# Altium PCB Copy of IR_Sensor.PcbDoc
Units mil, origin at the board's own origin, x right, y up, seen from the top; angles counter-clockwise.
Board outline 1602.49 x 1674.6 mil, 4 copper layers (Top Layer, GND, PWR, Bottom Layer), stack 61.581 mil thick; 53 components, 41 nets, 214 pads, 214 vias.
Unrouted connection lines stored in the file: 2.
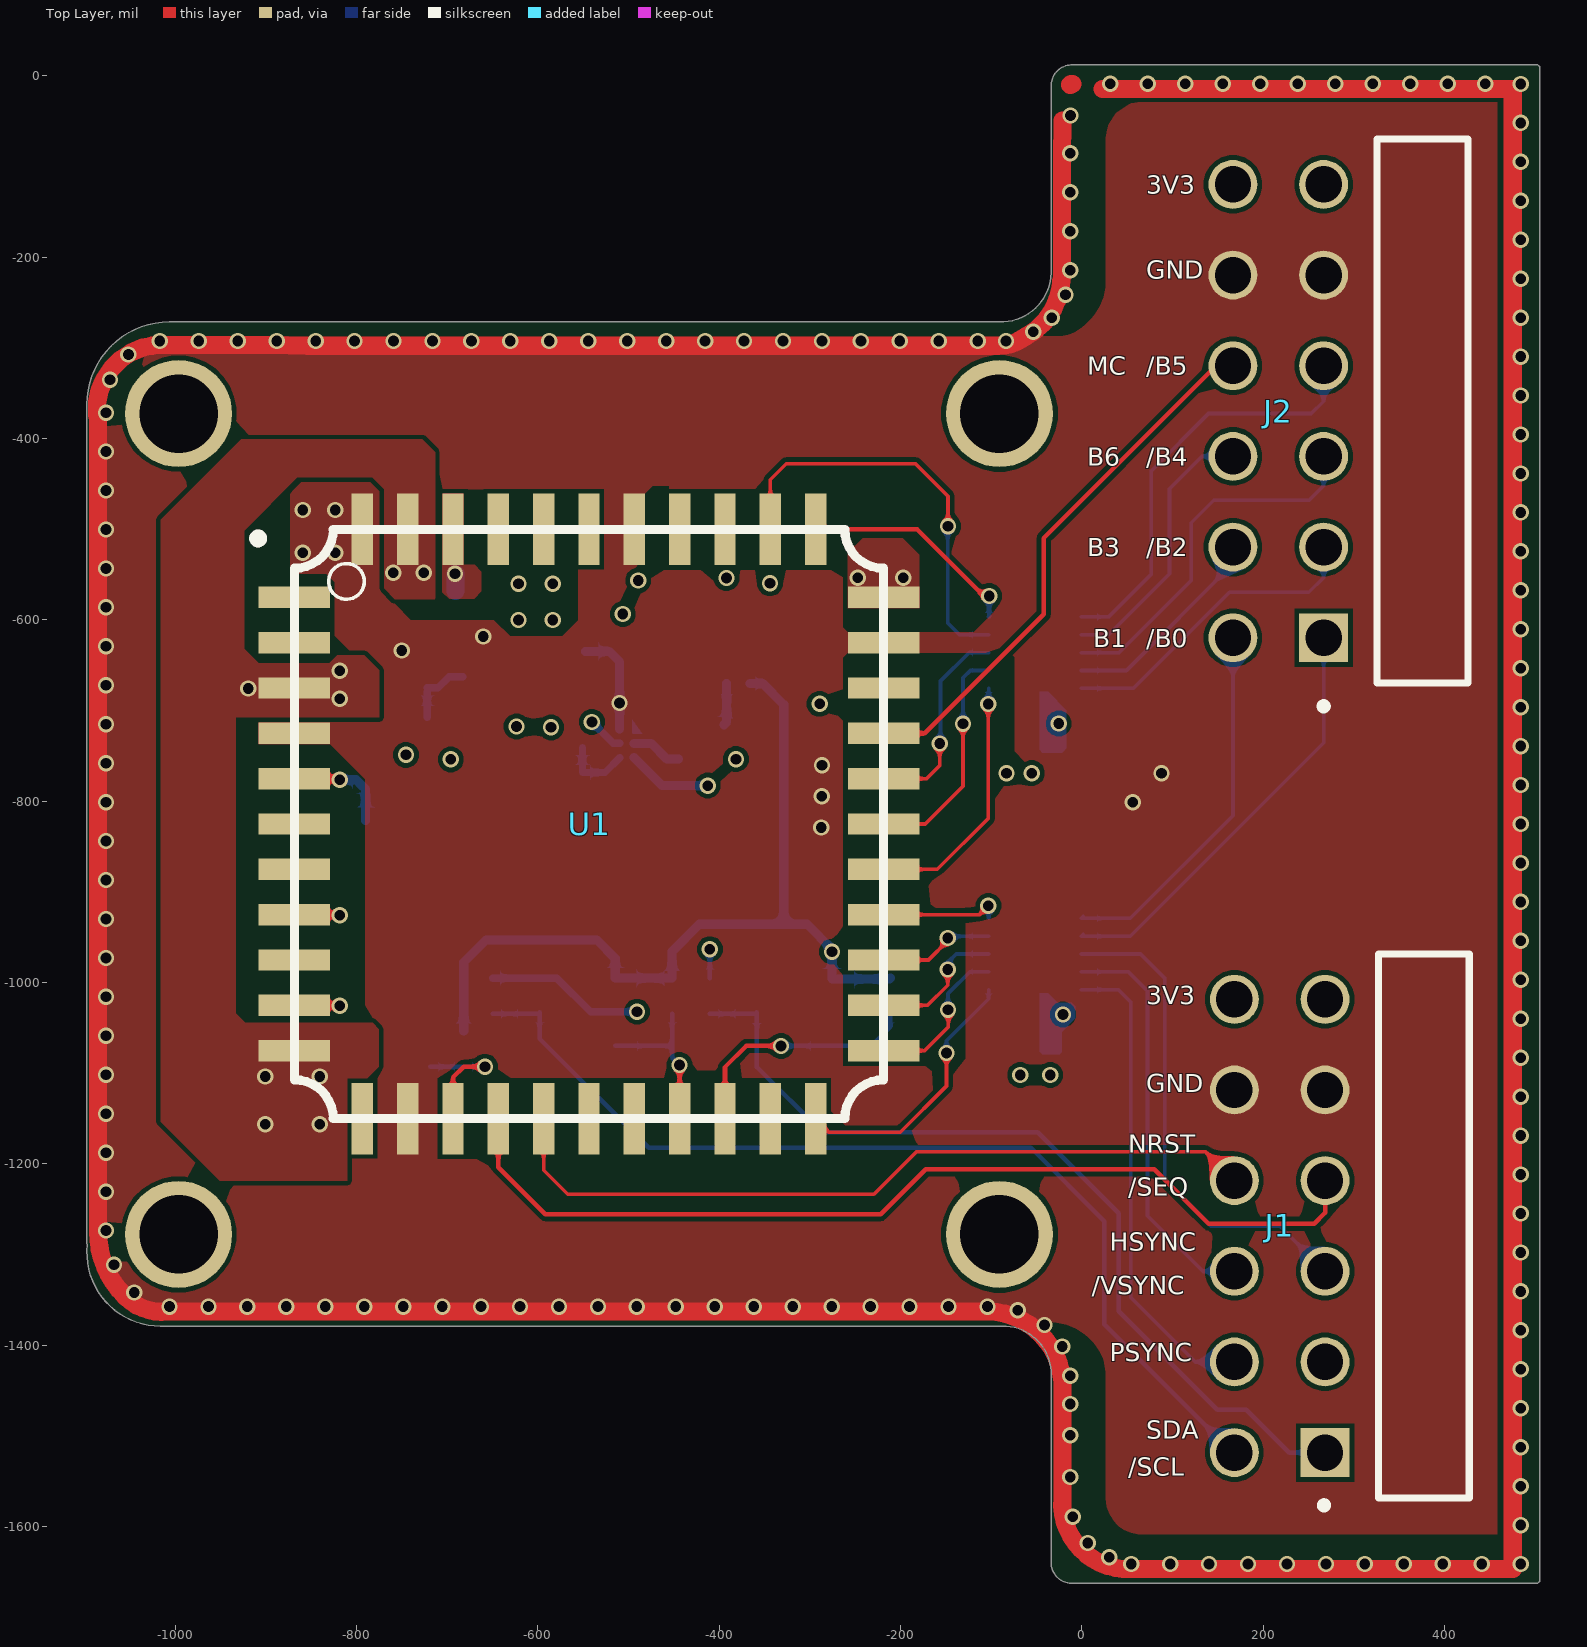
[diagram p0: Top Layer view]
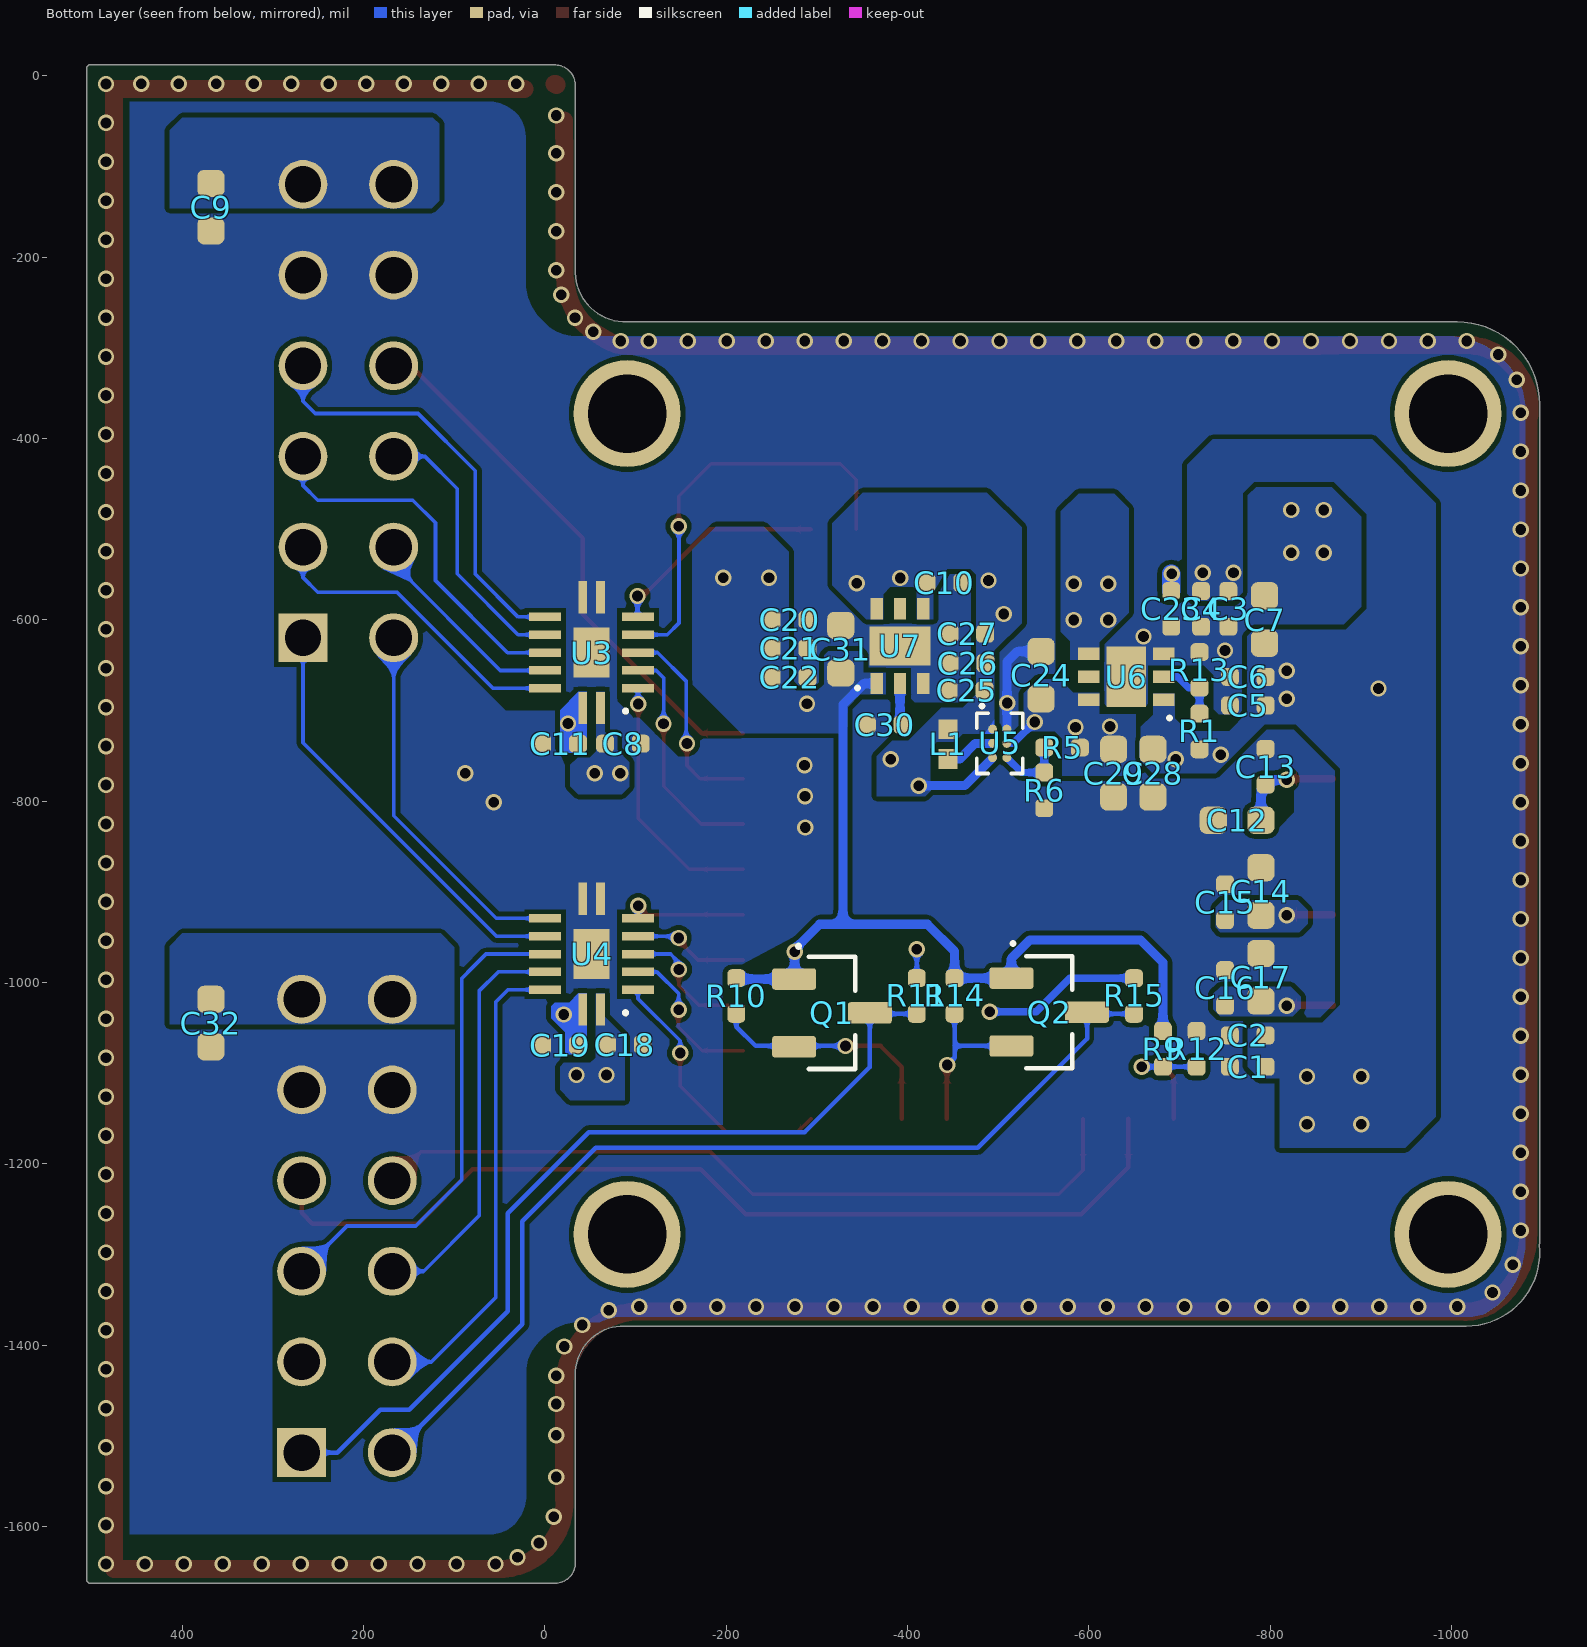
[diagram p1: Bottom Layer view, seen from below]
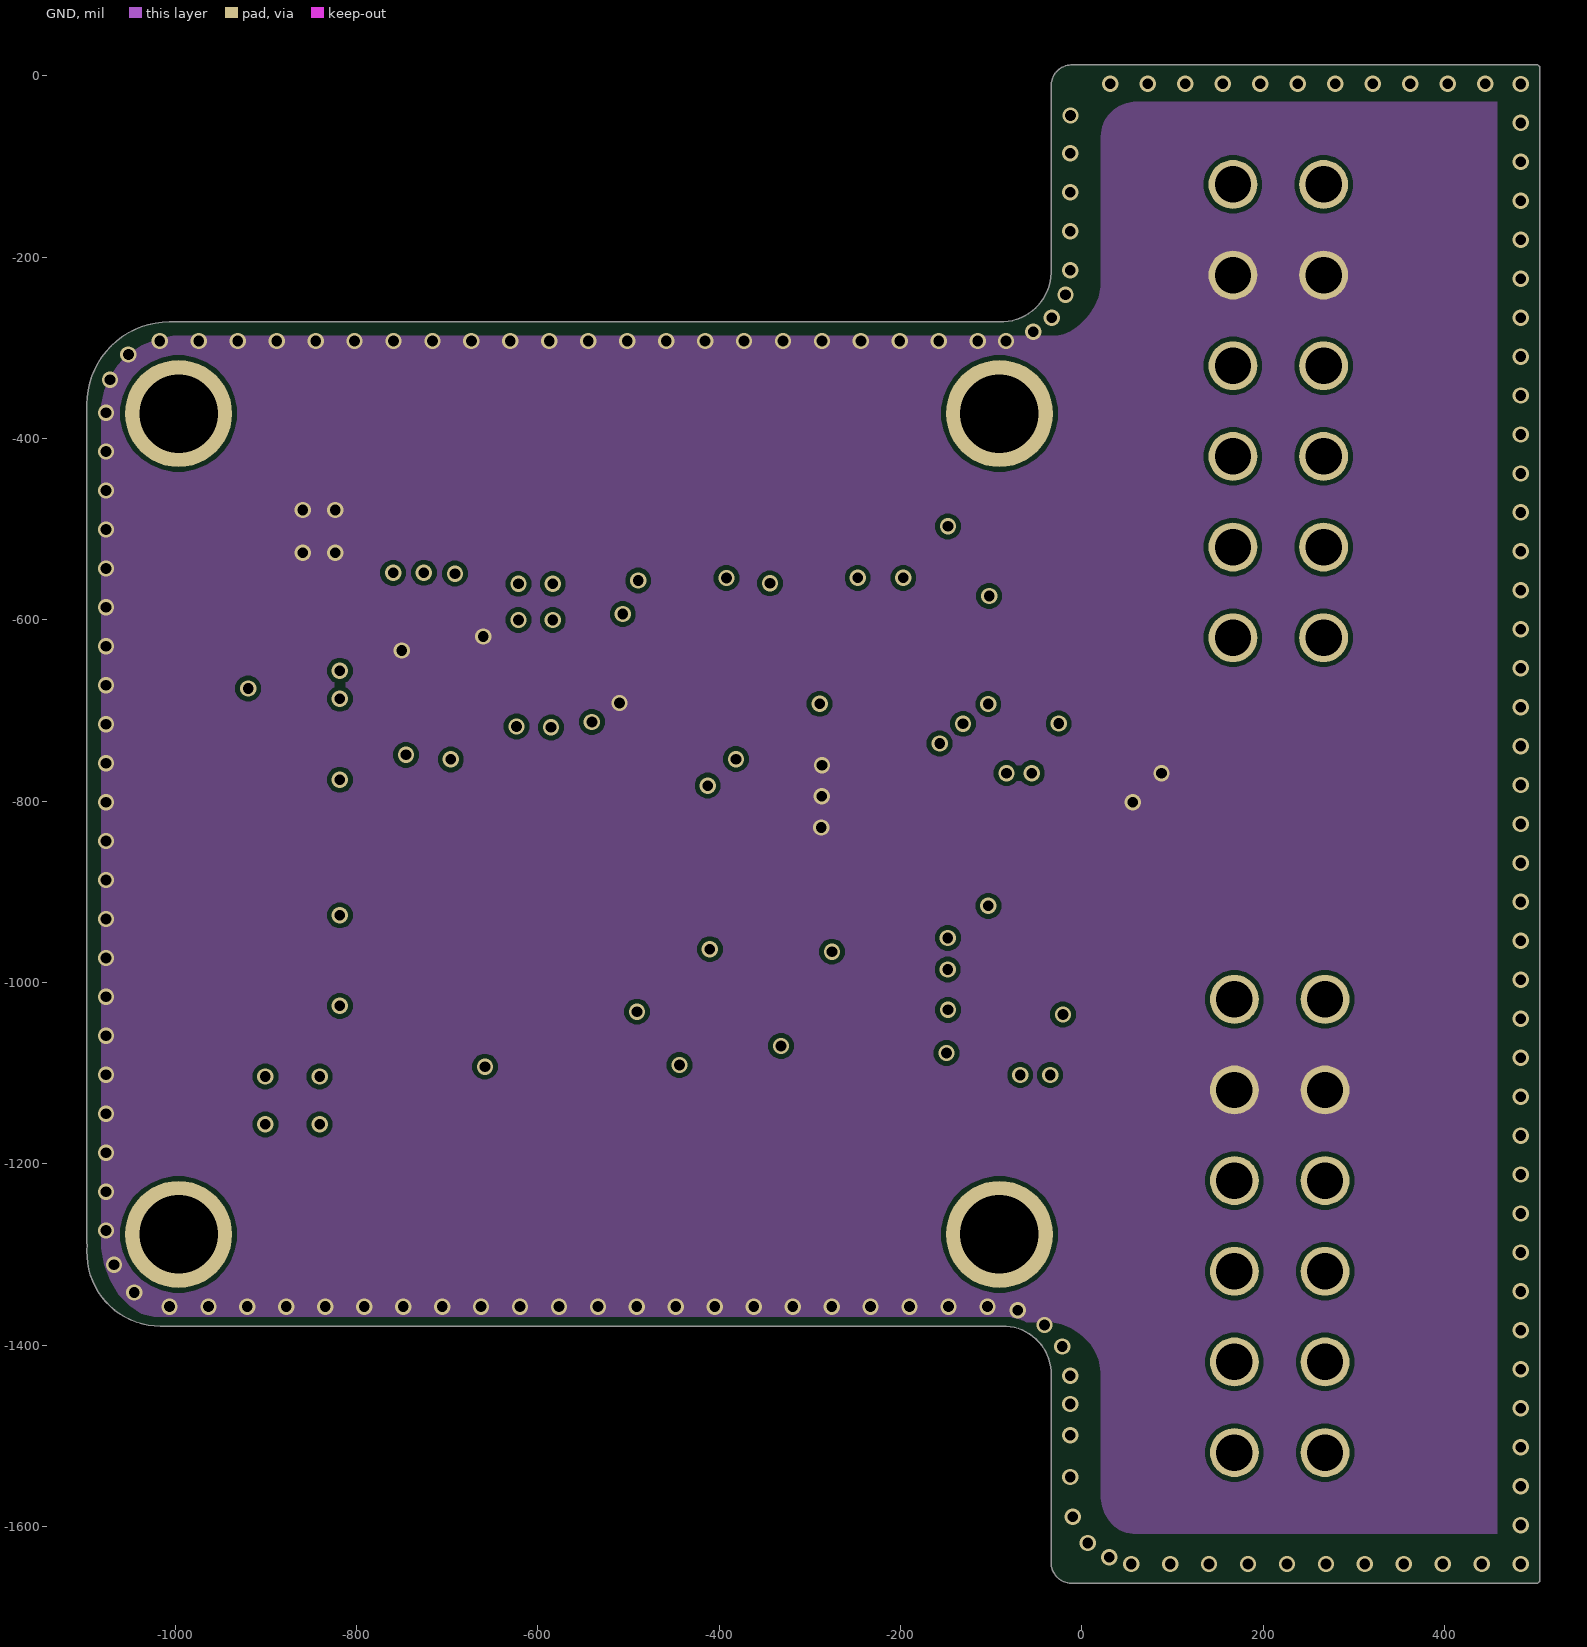
[diagram p2: GND]
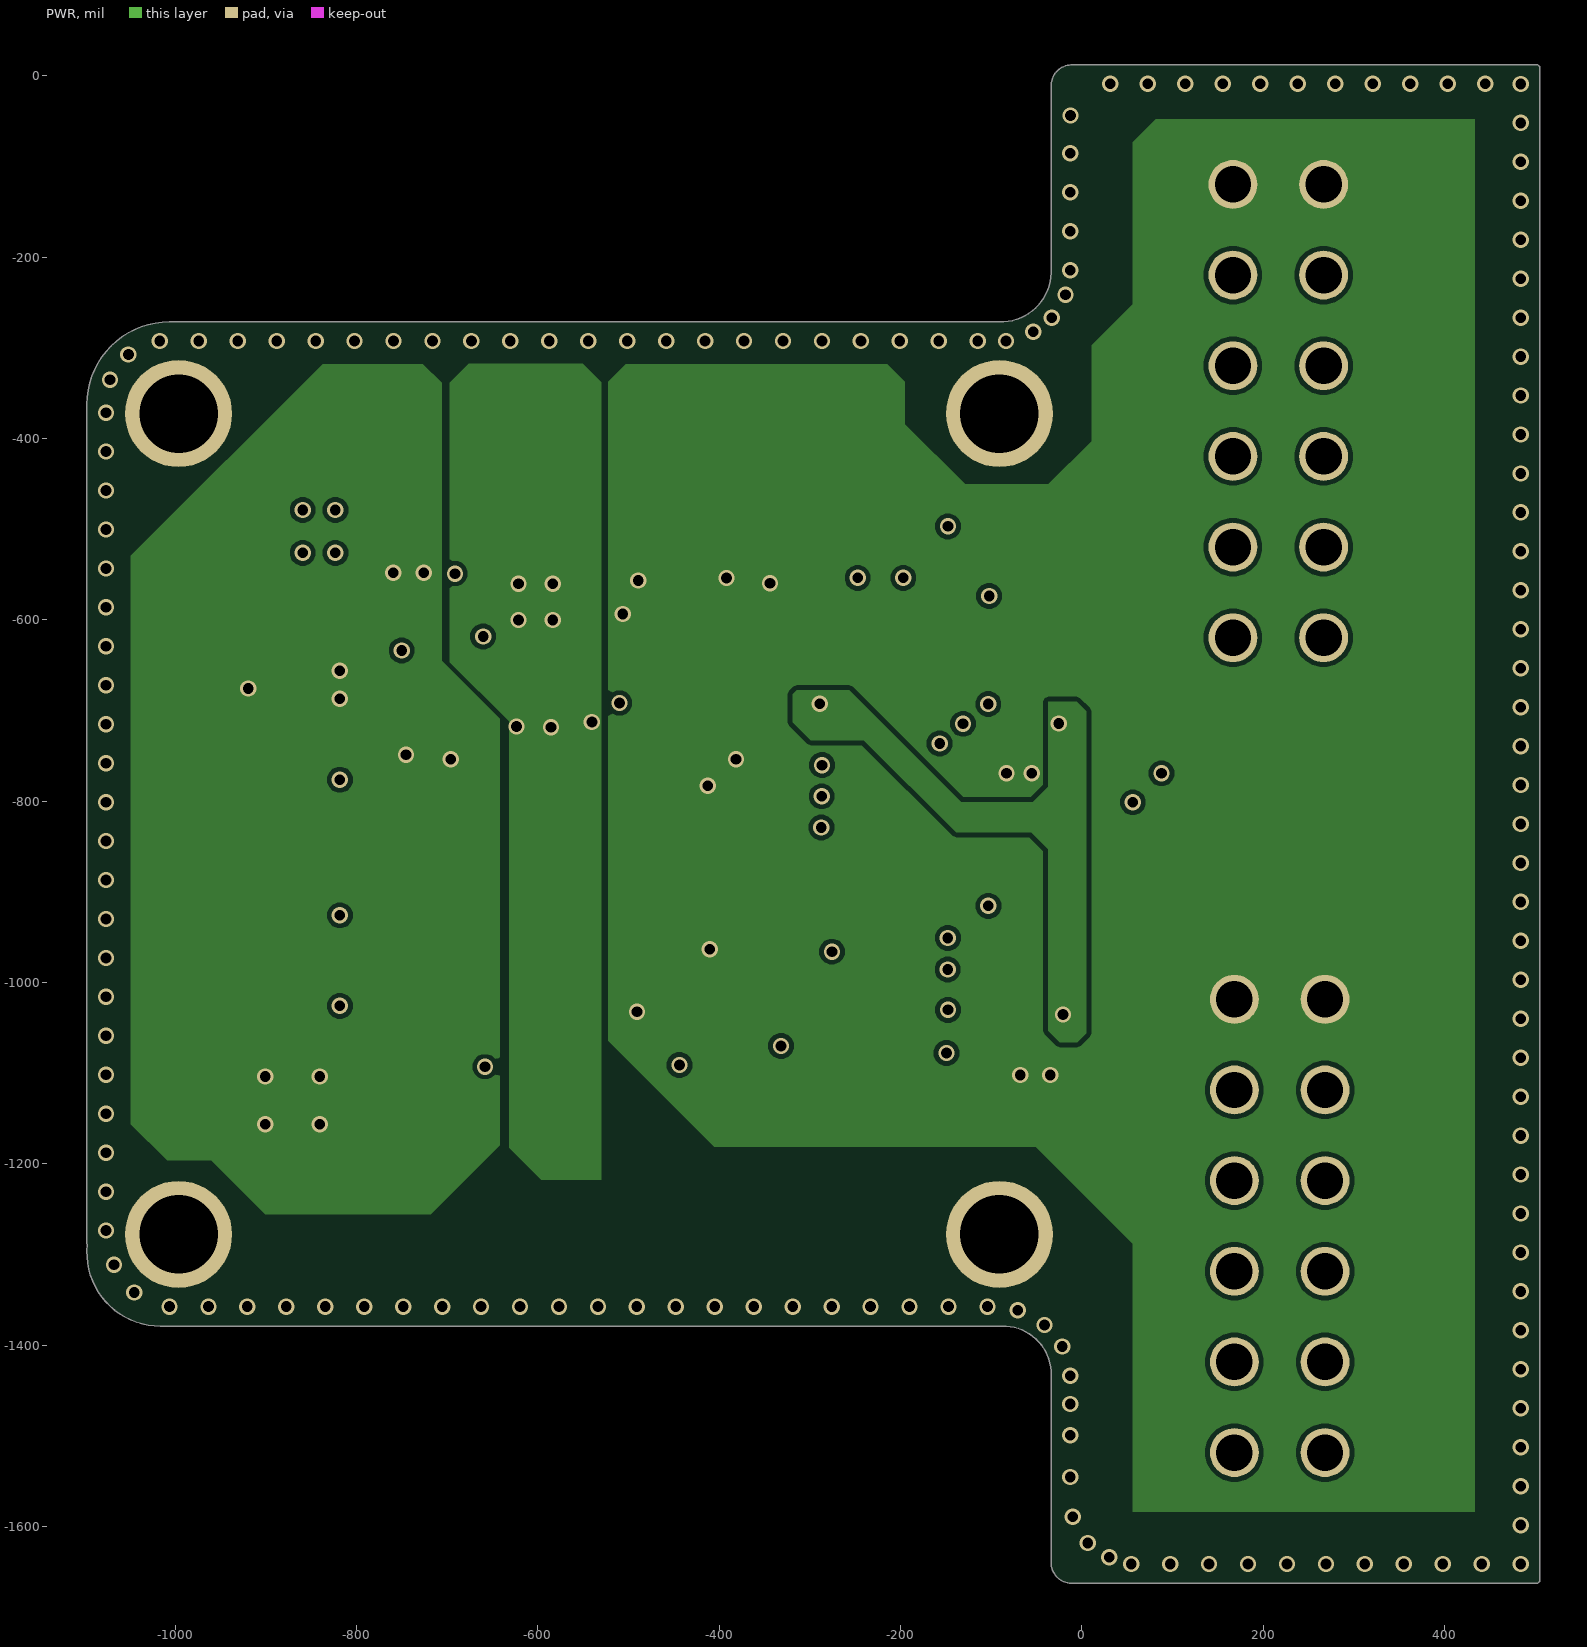
[diagram p3: PWR]

## Layer stack, top to bottom
Top Solder: solder mask 0.4, Solder Resist, Dk 3.5
Top Layer: signal copper 1.378
Dielectric 2: prepreg 3.913, PP-006, Dk 4.1
GND: signal copper 0.598
Dielectric1: dielectric 49.803, FR-4, Dk 4.8
PWR: signal copper 0.598
Dielectric3: dielectric 3.913, FR-4, Dk 4.29
Bottom Layer: signal copper 1.378
Bottom Solder: solder mask 0.4, Solder Resist, Dk 3.5

## Board outline
-1016.27,-1379.12 cw(c-1016.25,-1298.04) -1096.86,-1289.34 -1097.33,-1288.04 -1097.33,-362.53 cw(c-1006.25,-362.53) -1006.25,-271.45 -90.74,-271.45 -90.68,-271.45 ccw(c-89.25,-215.88) -33.68,-217.34 -33.68,-10 -33.68,-9.92 cw(c-10.83,-10.83) -10,12.02 503.15,12.01 505.16,10 505.16,-825.29 505.16,-1660.57 503.15,-1662.59 -9.93,-1662.59 cw(c-11.34,-1640.24) -33.68,-1641.72 -33.68,-1641.59 -33.68,-1428.72 ccw(c-86.97,-1432.41) -83.27,-1379.12

## Design rules (kind name [scope] priority, off if disabled: settings)
BoardOutlineClearance [All] p1: gap=10 ignorepadtopadclearanceinfootprint=FALSE
Clearance [All] p1: gap=5 ignorepadtopadclearanceinfootprint=TRUE
MatchedLengths [All] p1: tolerance=1000 checknetsindiffpair=FALSE checkdiffpairvsdiffpair=TRUE checkxsignals=TRUE checkothers=TRUE
MinimumSolderMaskSliver [All] p1: minsoldermaskwidth=0
PolygonConnect [All] p1: connectstyle=Direct reliefconductorwidth=10 reliefentries=4 polygonreliefangle="90 Angle" airgapwidth=10
RoutingVias [All] p1: holewidth=11.81 width=17.99 viastyle="Through Hole" minholewidth=11.81 minwidth=17.99 maxholewidth=11.81 maxwidth=17.99
SilkToSilkClearance SilkToSilkClearance_1 [All] p1: silktosilkclearance=0
SilkToSolderMaskClearance [IsPad] p1: minsilkscreentomaskgap=0 clearancetoexposedcopper=TRUE
SolderMaskExpansion [All] p1: expansion=1 istentingtop=FALSE
UnRoutedNet [All] p1: checkbadconnections=TRUE
ViasUnderSMD [All] p1: allowed=FALSE
Width [All] p1: maxlimit=200 minlimit=4 preferedwidth=4
26 further rules are at their usual default settings.

## Components (designator, comment, footprint, x,y, rotation, side; value= is the part's Value field where it differs from the comment)
C1 "Cap" CAPC0402 -775.28,-1093 r0 bottom value=1nF
C2 "Cap" CAPC0402 -775.28,-1058.52 r0 bottom value=0.1uF
C3 "Cap" CAPC0402 -753.88,-588.02 r270 bottom value=1nF
C4 "Cap" CAPC0402 -723.88,-588.02 r270 bottom value=0.1uF
C5 "Cap" CAPC0402 -775.28,-694.56 r0 bottom value=1nF
C6 "Cap" CAPC0402 -775.28,-663.09 r0 bottom value=0.1uF
C7 "Cap" CAPC0603 -793.81,-599.75 r270 bottom value=22uF
C8 "Cap" CAPC0402 -86.13,-736.67 r180 bottom value=0.1uF
C9 "Cap" CAPC0603 368.37,-144.91 r90 bottom value=22uF
C10 "Cap" CAPC0402 -440.71,-559.17 r180 bottom value=1uF
C11 "Cap" CAPC0402 -16.84,-736.67 r0 bottom value=0.1uF
C12 "Cap" CAPC0603 -763.55,-821.25 r0 bottom value=22uF
C13 "Cap" CAPC0402 -794.97,-762.12 r270 bottom value=0.1uF
C14 "Cap" CAPC0603 -789.81,-899.74 r90 bottom value=22uF
C15 "Cap" CAPC0402 -750.33,-911.47 r270 bottom value=0.1uF
C16 "Cap" CAPC0402 -750.33,-1006.12 r270 bottom value=0.1uF
C17 "Cap" CAPC0603 -789.81,-994.38 r90 bottom value=22uF
C18 "Cap" CAPC0402 -88.27,-1068.57 r180 bottom value=0.1uF
C19 "Cap" CAPC0402 -16.84,-1069.18 r0 bottom value=0.1uF
C20 "Cap" CAPC0402 -270,-599.78 r0 bottom value=4.7uF
C21 "Cap" CAPC0402 -270,-631.58 r180 bottom value=0.1uF
C22 "Cap" CAPC0402 -270,-663.39 r180 bottom value=1nF
C23 "Cap" CAPC0402 -690.88,-588.02 r90 bottom value=4.7uF
C24 "Cap" CAPC0603 -547.3,-661.17 r90 bottom value=22uF
C25 "Cap" CAPC0402 -465.22,-678.01 r180 bottom value=100uF
C26 "Cap" CAPC0402 -466.22,-647.96 r0 bottom value=0.1uF
C27 "Cap" CAPC0402 -465.96,-615.38 r0 bottom value=1nF
C28 "Cap" CAPC0603 -670.64,-769.18 r90 bottom value=22uF
C29 "Cap" CAPC0603 -627.33,-769.18 r90 bottom value=22uF
C30 "Cap" CAPC0402 -374.81,-715.82 r0 bottom value=0.1uF
C31 "Cap" CAPC0603 -326.4,-632.5 r90 bottom value=22uF
C32 "Cap" CAPC0603 368.37,-1044.91 r90 bottom value=22uF
J1 "Header 10X1_2.54MM_1" SAMTEC_HTSW-106-08-L-D-RA 377.42,-1268.65 r90 top locked
J2 "Header 10X1_2.54MM_1" SAMTEC_HTSW-106-08-L-D-RA 375.87,-369.84 r90 top locked
L1 "Inductor" IND_0402 -444.61,-737.1 r90 bottom value=2.2uH
Q1 "MOSFET-N Si2302CDS" BSS138 -316.66,-1033.7 r180 bottom
Q2 "MOSFET-N Si2302CDS" BSS138 -556.3,-1032.72 r180 bottom
R1 "Resistor" RESC0402 -722.03,-723.23 r270 bottom value=1.13M
R5 "Resistor" RESC0402 -570.48,-741.01 r0 bottom value=806K
R6 "Resistor" RESC0402 -550.79,-788.15 r90 bottom value=249K
R9 "Resistor" RESC0402 -681.68,-1073.32 r270 bottom value="0 ohm"
R10 "Resistor" RESC0402 -211.16,-1015 r270 bottom value=2.2K
R11 "Resistor" RESC0402 -410.24,-1015 r270 bottom value=2.2K
R12 "Resistor" RESC0402 -718.81,-1073.32 r90 bottom value="0 ohm"
R13 "Resistor" RESC0402 -722.03,-655.38 r270 bottom value=324K
R14 "Resistor" RESC0402 -451.9,-1015 r270 bottom value=2.2K
R15 "Resistor" RESC0402 -649.87,-1015 r270 bottom value=2.2K
U1 "Atto320-058" CQFP130P1823X1823X336-44N -543.49,-825.29 r0 top locked
U3 "FXL5T244BQX" FXL5T244BQX -51.48,-636.23 r90 bottom
U4 "FXL5T244BQX" FXL5T244BQX -51.48,-968.74 r90 bottom
U5 "TPS61099YFFT" "BGA TPS61099YFFT" -501.7,-736.35 r180 bottom
U6 "TPS71701QDRVRQ1" SON65P200X200X80-7N -641.14,-662.89 r0 bottom
U7 "TPS71718QDRVRQ1" SON65P200X200X80-7N -391.7,-628.97 r90 bottom

## Footprints (in the part's own frame and the unit in brackets; to place one, negate y for a bottom-side part, rotate by r counter-clockwise, add the part's x,y. Pads: shape width x height; smd on the part's side, far side on the other; paste and mask are expansions set on the pad)
"BGA TPS61099YFFT" [mm]
  round 0.25 smd: 1(0.2,0.4) 2(0.2,0) 3(0.2,-0.4) 4(-0.2,-0.4) 5(-0.2,0) 6(-0.2,0.4)
  silkscreen extent -0.64,-0.84 0.64,1.05, body extent -0.43,-0.63 0.43,0.63, height 0.63
BSS138 [mm]
  rrect25% 1.23x0.6 smd: 1(-1.06,0.95) 2(-1.06,-0.95) 3(1.06,0)
  silkscreen extent -0.94,-1.57 0.65,1.87, body extent -1.2,-1.46 1.2,1.46, height 1.2
CAPC0402 [mm]
  rrect50% 0.5x0.5 smd: 1(-0.5,0) 2(0.5,0)
  body extent -0.5,-0.25 0.5,0.25, height 0.42
CAPC0603 [mil]
  rrect50% 30x30 smd: 1(-26.26,0) 2(26.26,0)
  body extent -31,-16 31,16, height 34
CQFP130P1823X1823X336-44N [mm] "CQFP, 44-Leads, Body 18.23x18.23mm, Pitch 1.30mm, IPC Medium Density"
  rect 2x0.6 smd: 1(-8.255,6.35) 2(-8.255,5.08) 3(-8.255,3.81) 4(-8.255,2.54) 5(-8.255,1.27) 6(-8.255,0) 7(-8.255,-1.27) 8(-8.255,-2.54) 9(-8.255,-3.81) 10(-8.255,-5.08) 11(-8.255,-6.35) 23(8.255,-6.35) 24(8.255,-5.08) 25(8.255,-3.81) 26(8.255,-2.54) 27(8.255,-1.27) 28(8.255,0) 29(8.255,1.27) 30(8.255,2.54) 31(8.255,3.81) 32(8.255,5.08) 33(8.255,6.35)
  rect 0.6x2 smd: 12(-6.35,-8.255) 13(-5.08,-8.255) 14(-3.81,-8.255) 15(-2.54,-8.255) 16(-1.27,-8.255) 17(0,-8.255) 18(1.27,-8.255) 19(2.54,-8.255) 20(3.81,-8.255) 21(5.08,-8.255) 22(6.35,-8.255) 34(6.35,8.255) 35(5.08,8.255) 36(3.81,8.255) 37(2.54,8.255) 38(1.27,8.255) 39(0,8.255) 40(-1.27,8.255) 41(-2.54,8.255) 42(-3.81,8.255) 43(-5.08,8.255) 44(-6.35,8.255)
  silkscreen extent -9.4,-8.25 8.25,8.25, body extent -8.25,-8.25 8.25,8.25, height 3.36
FXL5T244BQX [mm]
  rect 0.9x0.24 smd: 1(-1.55,-0.25) 7(1.55,-0.25) 8(1.55,0.25) 14(-1.55,0.25)
  rect 0.24x0.9 smd: 2(-1,-1.3) 3(-0.5,-1.3) 4(0,-1.3) 5(0.5,-1.3) 6(1,-1.3) 9(1,1.3) 10(0.5,1.3) 11(0,1.3) 12(-0.5,1.3) 13(-1,1.3)
  rect 1.4x1 smd: 15(0,0)
  silkscreen extent -1.69,-1 -1.59,-0.9, body extent -1.5,-1.25 1.5,1.25, height 0.9
IND_0402 [mm]
  rect 0.55x0.53 smd: 1(0.419,0) 2(-0.419,0)
  body extent -0.5,-0.25 0.5,0.25, height 0.55
RESC0402 [mm]
  rrect50% 0.5x0.5 smd: 1(0.5,0) 2(-0.5,0)
  body extent -0.5,-0.25 0.5,0.25, height 0.4
SAMTEC_HTSW-106-08-L-D-RA [mm]
  rect 1.37x1.37 / inner round 1.37 / far side rect 1.37x1.37 hole 1.02: 1(-6.35,2.77)
  round 1.37 hole 1.02: 2(-6.35,5.31) 3(-3.81,2.77) 4(-3.81,5.31) 5(-1.27,2.77) 6(-1.27,5.31) 7(1.27,2.77) 8(1.27,5.31) 9(3.81,2.77) 10(3.81,5.31) 11(6.35,2.77) 12(6.35,5.31)
  silkscreen extent -7.93,-1.27 7.62,2.9, body extent -7.64,-7.17 7.6,5.6, height 6.1
SON65P200X200X80-7N [mm]
  rect 0.6x0.35 smd: 1(-1.05,0.65) 2(-1.05,0) 3(-1.05,-0.65) 4(1.05,-0.65) 5(1.05,0) 6(1.05,0.65)
  rect 1.1x1.7 smd: 7(0,0)
  silkscreen extent -1.22,1.15 -1.22,1.15, body extent -1.05,-1 1.05,1, height 0.8

## Part data
C1 C3 C5 C22 C27: "Ceramic Capacitor,1nF, 0402,4V,X7R", Case/Package=0402, dielectric=X7R, Voltage=4v
C2 C4 C6 C8 C11 C13 C15 C16 C18 C19 C21 C26: "Ceramic Capacitor,0.1uF, 0402", Case/Package=0402, dielectric=X5R, Voltage=16v
C7 C9 C12 C14 C17 C24 C28 C29 C31 C32: "Ceramic Capacitor,22uF, 0402, 10V", Case/Package=0603, dielectric=X7R, Voltage=10v
C10: "Ceramic Capacitor,1uF, 0402", Case/Package=0402, dielectric=X5R, Voltage=16V
C20 C23: "Ceramic Capacitor,4.7uF, 0402,6.3V", Case/Package=0402, dielectric=X5R, Voltage=6.3v
C25: "Ceramic Capacitor,0.1uF, 0402", Case/Package=1206, dielectric=X5R, Voltage=6.3V
C30: "Ceramic Capacitor,0.1uF, 0402", Case/Package=0402, dielectric=X5R, Voltage=16V
J1 J2: Case/Package=TH, Manufacturer Part Number="TH 2.54MM"
L1: "2.2uH,1.3A", Case/Package=0806, Current=1.3A
Q1 Q2: library part bss138_1, "N-Channel 50 V 220mA (Ta) 350mW (Ta) Surface Mount SOT-23", Case/Package="TO-236-3, SC-59, SOT-23-3", Manufacturer Part Number=BSS138
R1: "Thick Film Resistor -  1.13M, 1%, 0402", Case/Package=0402
R5: "Thick Film Resistor -  806K, 1%, 0402", Case/Package=0402
R6: "Thick Film Resistor -  249KK, 1%, 0402", Case/Package=0402
R9 R12: "Thick Film Resistor -  0 ohm, 1%, 0402", Case/Package=0402
R10 R11 R14 R15: "Thick Film Resistor -  2.2k, 1%, 0402", Case/Package=0402
R13: "Thick Film Resistor -  324K, 1%, 0402", Case/Package=0402
U1: "tharmal image sensor Atto320-015", Case/Package="J-LEAD 44", Manufacturer Part Number=ATTO320-058
U3 U4: "Voltage Level Translator Unidirectional 1 Circuit 5 Channel 14-DQFN (3x2.5)", Case/Package="14-VFQFN Exposed Pad", Manufacturer Part Number=FXL5T244BQX
U5: "Boost Switching Regulator IC Positive Adjustable 1.8V 1 Output 800mA (Switch) 6-UFBGA, DSBGA", Case/Package="6-UFBGA, DSBGA", Manufacturer Part Number=TPS61099YFFT
U6: "Linear Voltage Regulator IC Positive Adjustable 1 Output 150mA 6-WSON (2x2)", Case/Package="6-WSON (2x2)", Manufacturer_Part_Number=TPS71701QDRVRQ1
U7: "Linear Voltage Regulator IC Positive Fixed 1 Output 150mA 6-WSON (2x2)", Case/Package="6-WDFN Exposed Pad", Manufacturer Part Number=TPS71718QDRVRQ1

## Free pads (board coordinates)
  round 118.11 hole 86.61 mask+1: 2(-996.25,-1278.04) 2(-996.25,-372.53) 2(-90.74,-1278.04) 2(-90.74,-372.53)

## Via types
v1: diameter 17.99, hole 11.81, Top Layer to Bottom Layer, tented both sides, 214 vias

## Nets (pads, with @x,y where several pads share a name; then routed paths per layer and width w, separated by ;. In a path a pad name is that pad's centre, name@x,y a point inside that pad or via, vN(x,y) a via of type N, cw(c..) or ccw(c..) an arc to the next point about the centre after c; other vN are vias at no path point)
1.8V: C11.1 C19.1 C20.2 C21.1 C22.1 C31.1 Q1.1 Q2.1 R9.2 R10.2 R14.2 U1.33 U3.14 U4.14 U7.1 | length 962.2
  Bottom Layer w10: R9.2 -681.68,-977.97 -656.84,-953.12 -535.07,-953.12 -514.56,-973.63 Q2.1 R14.2 -451.9,-965.91 -421.83,-935.84 -328.69,-935.84 ; U7.1 -352.01,-670.31 -328.69,-693.63 -328.69,-935.84 ; R10.2 -212.14,-996.3 Q1.1 -275.42,-995.81 -275.42,-966.32 v1(-275.56,-966.18) -275.56,-963.29 -303.01,-935.84 -328.69,-935.84
  other v1: -20.71,-1035.39 -25.4,-714.46 -289.07,-692.65 -247.1,-553.81 -196.86,-553.81
3.3V: C8.1 C9.2 C10.1 C18.1 C25.2 C26.1 C27.1 C32.2 J1.11 J1.12 J2.11 J2.12 L1.1 R11.2 R15.2 U3.1 U4.1 U5.4 U5.6 U7.4 U7.6 | length 300.6
  Bottom Layer w5: R11.2 v1(-410.24,-963.43)
  Bottom Layer w8: R15.2 -578.93,-995.32 -541.91,-1032.35 v1(-490.56,-1032.35)
  Bottom Layer w10: U5.4 -462.95,-782.97 v1(-412.54,-782.97)
  other v1: -67.87,-1102.13 -34.86,-1102.13 -82.97,-769.2 -55.09,-769.2 -381.39,-753.79 -506.22,-593.71 -343.91,-559.75 -489.22,-556.75 -391.91,-553.98
3.6V: C1.1 C2.1 C3.1 C4.1 C5.1 C6.1 C7.2 C28.2 R1.1 U1.3 U1.11 U1.43 U6.1
  other v1: -900.47,-1156.57 -840.57,-1156.57 -900.47,-1103.79 -840.57,-1103.79 -695.97,-753.98 -745.39,-748.98 -818.35,-687.16 -919.46,-675.84 -818.35,-656.25 -759.54,-548.22 -725.69,-548.15
4.2V: C24.1 C29.2 R5.2 U5.2 U6.4 U6.6 | length 40.5
  Bottom Layer w8: v1(-540.3,-712.68) -516.63,-736.35 U5.2
  other v1: -585.36,-718.68 -623.43,-717.68 -621.35,-600.22 -583.47,-600.22 -621.35,-560.33 -583.47,-560.33
B0IN: U1.25 U4.5 | length 128.7
  Top Layer w4: U1.25 -168.93,-975.29 -147.67,-954.02 v1(-147.67,-950.98)
  Bottom Layer w4: v1(-147.67,-950.98) -147.67,-950.55 -146.17,-949.06 U4.5
B0OUT: J2.1 U4.10 | length 474.2
  Bottom Layer w4: U4.10@1.7,-947.06 U4.10 53.45,-949.06 266.81,-735.7 J2.1
B1IN: U1.26 U4.6 | length 133.4
  Top Layer w4: U1.26 -112.74,-925.29 v1(-103.02,-915.57)
  Bottom Layer w4: v1(-103.02,-915.57) -102.67,-915.93 U4.6
B1OUT: J2.2 U4.9 | length 413.1
  Bottom Layer w4: U4.9@1.7,-927.37 U4.9 53.52,-929.37 166.81,-816.08 J2.2
B2IN: U1.27 U3.2 | length 280.4
  Top Layer w4: U1.27 -159.23,-875.29 -103.11,-819.16 v1(-103.11,-692.95)
  Bottom Layer w4: U3.2 -102.67,-690.39 v1@-102.11,-690.95
B2OUT: J2.3 U3.13 | length 351.3
  Bottom Layer w4: U3.13 57.18,-675.6 163.06,-569.73 250.52,-569.73 266.81,-553.43 J2.3
B3IN: U1.28 U3.3 | length 256.1
  Top Layer w4: U1.28 -172.48,-825.29 -130.95,-783.76 v1@-130.95,-714.74
  Bottom Layer w4: v1(-130.93,-714.72) -130.93,-664.04 -122.81,-655.92 U3.3
B3OUT: J2.4 U3.12 | length 234.3
  Bottom Layer w4: U3.12 49.28,-655.92 166.81,-538.38 J2.4
B4IN: U1.29 U3.4 | length 226
  Top Layer w4: U1.29 -171.21,-775.29 -156.7,-760.78 v1@-156.7,-736.55
  Bottom Layer w4: v1@-155.76,-735.49 -155.76,-667.56 -124.43,-636.23 U3.4
  other v1: -156.76,-736.49
B4OUT: J2.5 U3.11 | length 412.8
  Bottom Layer w4: U3.11 41.12,-636.23 120.68,-556.68 120.68,-493.03 145.66,-468.05 250.69,-468.05 266.81,-451.93 J2.5
B5IN: U1.34 U3.6 | length 245
  Top Layer w5: U1.34 -181.68,-500.29 -108.16,-573.81 v1(-102.17,-573.81)
  Bottom Layer w5: U3.6 -102.17,-596.36 v1(-102.17,-573.81)
B5OUT: J2.7 U3.9 | length 471.6
  Bottom Layer w4: U3.9 29.57,-596.86 76.87,-549.57 76.87,-435.51 139.84,-372.53 253.18,-372.53 266.81,-358.9 J2.7
B6IN: U1.35 U3.5 | length 463.3
  Top Layer w4: U1.35 -343.49,-445.52 -325.93,-427.96 -183.3,-427.96 -147.57,-463.69 v1(-147.57,-496.93)
  Bottom Layer w4: v1(-147.57,-496.93) -147.87,-497.23 -147.87,-603.52 -134.84,-616.55 U3.5
B6OUT: J2.6 U3.10 | length 303.7
  Bottom Layer w4: U3.10 29.57,-616.55 96.75,-549.37 96.75,-455.38 132.3,-419.84 J2.6
GFID: C16.2 C17.1 U1.10 | length 50.7
  Top Layer w8: U1.10 -819.77,-1025.29 v1@-818.35,-1023.86
  other v1: -818.35,-1025.86
GND: C1.2 C2.2 C3.2 C4.2 C5.2 C6.2 C7.1 C8.2 C9.1 C10.2 C11.2 C12.2 C13.1 C14.2 C15.1 C16.1 C17.2 C18.2 C19.2 C20.1 C21.2 C22.2 C23.1 C24.2 C25.1 C26.2 C27.2 C28.1 C29.1 C30.2 C31.2 C32.1 J1.9 J1.10 J2.9 J2.10 R6.2 R12.1 R13.2 U1.4 U1.13 U1.32 U1.38 U1.44 U3.7 U3.8 U3.15 U4.7 U4.8 U4.15 U5.1 U6.3 U6.7 U7.3 U7.7 | length 6264.9
  Top Layer w20: -1053.97,-1347.55 -1055.76,-1345.76 cw(c-985.05,-1275.05) -1085.05,-1275.05 -1085.05,-1150.41 -1085.05,-377.08 -1086.05,-374.24 -1086.05,-361.08 -1083.32,-347.35 -1080.64,-340.88 -1077.96,-334.41 -1070.18,-322.77 -1060.28,-312.87 -1048.64,-305.09 -1035.71,-299.73 -1025.69,-297.74 -1021.97,-297 -896.96,-297 -896.73,-297.01 -853.79,-298.01 -123.43,-298.01 -92.24,-298.01 ccw(c-92.24,-249.98) -64.56,-289.22 ccw(c-73.05,-271.12) -62.37,-288.03 -53.16,-282.21 ccw(c-63.84,-265.3) -50.07,-279.81 -42.17,-272.31 ccw(c-55.94,-257.8) -39.6,-269.34 -33.32,-260.45 ccw(c-49.65,-248.91) -31.38,-257.04 -26.95,-247.09 ccw(c-45.22,-238.95) -25.71,-243.37 -23.31,-232.74 ccw(c-42.82,-228.33) -22.87,-229.83 -22.64,-226.66 -21.4,-219.94 ; -1053.7,-1347.44 ccw(c-1015.37,-1309.1) -1015.37,-1363.31 ; -1016.28,-1363.16 -112.76,-1363.16 cw(c-105.27,-1447.03) -21.4,-1439.54 -21.4,-1470.57 -21.4,-1505.13 -21.4,-1551.17 -21.4,-1568.43 ccw(c51.55,-1574.18) 45.81,-1647.13 475.43,-1647.13 475.43,-1002.69 475.43,-573.06 475.43,-14.55 436.47,-14.55 395.1,-14.55 353.73,-14.55 312.36,-14.55 270.99,-14.55 229.62,-14.55 188.25,-14.55 146.88,-14.55 105.51,-14.55 64.14,-14.55 22.78,-14.55 ; -21.66,-219.94 -21.66,-176.98 -21.66,-134.02 -21.66,-91.05 -21.18,-49.33 ; -12.67,-9.92 cw(c-10.45,-12.14) -10.45,-9
  Bottom Layer w10: C24.2 -521.29,-634.91 -509.73,-646.48 -509.73,-691.63 v1(-509.92,-691.82) -509.73,-692.01 U5.1@-509.73,-720.6
  other v1: 54.53,-1641.58 97.49,-1641.58 140.45,-1641.58 183.42,-1641.58 226.38,-1641.58 269.34,-1641.58 312.3,-1641.58 355.27,-1641.57 398.23,-1641.57 441.19,-1641.57 484.15,-1641.57 30.21,-1634.2 6.55,-1618.42 484.15,-1598.61 -9.93,-1589.25 484.15,-1555.65 -12.67,-1545.62 484.15,-1512.69 -12.67,-1499.58 484.15,-1469.72 -12.67,-1465.02 -12.67,-1433.99 484.15,-1426.76 -21.45,-1401.53 484.15,-1383.8 -41.06,-1377.95 -70.46,-1361.49 -1006.25,-1357.6 -963.29,-1357.6 -920.32,-1357.6 -877.36,-1357.6 -834.4,-1357.6 -791.43,-1357.6 -748.47,-1357.6 -705.51,-1357.6 -662.55,-1357.6 -619.58,-1357.6 -576.62,-1357.6 -533.66,-1357.6 -490.7,-1357.6 -447.73,-1357.6 -404.77,-1357.61 -361.81,-1357.61 -318.85,-1357.61 -275.88,-1357.61 -232.92,-1357.61 -189.96,-1357.61 -146.99,-1357.61 -104.03,-1357.61 -1045.25,-1342 484.15,-1340.84 -1067.42,-1311.34 484.15,-1297.87 -1076.33,-1273.74 484.15,-1254.91 -1076.32,-1230.78 484.15,-1211.95 -1076.32,-1187.82 484.15,-1168.99 -1076.32,-1144.85 484.15,-1126.02 -1076.32,-1101.89 484.15,-1083.06 -1076.32,-1058.93 484.15,-1040.1 -1076.32,-1015.97 484.15,-997.14 -1076.32,-973 484.15,-954.17 -1076.32,-930.04 484.15,-911.21 -1076.32,-887.08 484.15,-868.25 -1076.32,-844.12 -287.26,-829.05 484.15,-825.29 -1076.32,-801.15 56.3,-801.35 -286.84,-794.69 484.15,-782.32 87.95,-769.37 -286.42,-760.32 -1076.32,-758.19 484.15,-739.36 -1076.32,-715.23 484.15,-696.4 -1076.32,-672.27 484.15,-653.43 -750.1,-633.84 -1076.32,-629.3 -660.27,-618.42 484.15,-610.47 -1076.32,-586.34 484.15,-567.51 -1076.32,-543.38 -859.26,-526.2 -823.3,-526.2 484.15,-524.55 -1076.32,-500.41 484.15,-481.58 -859.26,-478.96 -823.3,-478.96 -1076.32,-457.45 484.15,-438.62 -1076.32,-414.49 484.15,-395.66 -1076.32,-371.53 484.15,-352.7 -1071.92,-335.33 484.15,-309.73 -1051.56,-307.32 -1016.92,-292.45 -973.96,-292.45 -930.99,-292.45 -888.03,-292.45 -845.07,-292.45 -802.11,-292.45 -759.14,-292.46 -716.18,-292.46 -673.22,-292.46 -630.25,-292.46 -587.29,-292.46 -544.33,-292.46 -501.37,-292.46 -458.4,-292.46 -415.44,-292.46 -372.48,-292.46 -329.52,-292.46 -286.55,-292.46 -243.59,-292.46 -200.63,-292.46 -157.67,-292.46 -114.7,-292.46 -83.52,-292.46 -53.38,-282.48 -33.18,-266.76 484.15,-266.77 -17.96,-241.53 484.15,-223.81 -12.67,-214.39 484.15,-180.85 -12.67,-171.43 484.15,-137.88 -12.67,-128.47 484.15,-94.92 -12.67,-85.5 484.15,-51.96 -12.46,-43.78 31.5,-8.91 72.87,-8.91 114.24,-8.91 155.61,-8.91 196.98,-8.91 238.34,-8.91 279.71,-8.91 321.08,-8.91 362.45,-8.91 403.82,-8.91 445.19,-8.91 484.15,-9
GSK: C14.1 C15.2 U1.8 | length 50.4
  Top Layer w8: U1.8 -819.02,-925.29 v1(-818.35,-925.96)
HSYNC: U1.23 U4.3 | length 173.9
  Top Layer w4: U1.23 -173.43,-1075.29 -147.06,-1048.92 -147.06,-1030.71 v1(-147.51,-1030.26)
  Bottom Layer w4: v1(-147.51,-1030.26) -147.51,-1012.35 -123.59,-988.43 -111.53,-988.43 U4.3
"HSYNC C": J1.6 U4.12 | length 450.7
  Bottom Layer w4: U4.12 51.47,-988.43 72.57,-1009.52 72.57,-1257.54 133.67,-1318.65 J1.6
I2CAD: R9.1 R12.2 U1.14 | length 146.1
  Top Layer w5: U1.14 -693.49,-1104.81 -681.68,-1093.01 v1(-658.27,-1093.01)
  Bottom Layer w5: R12.2 R9.1 v1(-658.27,-1093.01)
MC: J2.8 U1.30 | length 602.5
  Top Layer w5: U1.30 -173.19,-725.29 -41.94,-594.04 -41.94,-509.88 148.1,-319.84 J2.8
NetC30_1: C30.1 U7.2 | length 46.7
  Bottom Layer w10: C30.1 -391.7,-713.03 U7.2
NetL1_2: L1.2 U5.5 | length 56.4
  Bottom Layer w10: U5.5 -474.88,-736.35 -457.63,-753.59 L1.2
NetR1_2: R1.2 R13.1 U6.2 | length 73.1
  Bottom Layer w8: R1.2@-722.03,-707.55 R13.1@-722.03,-679.06 ; R13.1 -709.96,-675.06 -697.78,-662.89 U6.2
NetR5_1: R5.1 R6.1 U5.3 | length 75.5
  Bottom Layer w8: R5.1 R6.1 -525.94,-768.46 U5.3
NRST: J1.8 U1.16 | length 862.7
  Top Layer w4: U1.16 -593.49,-1207.3 -566.96,-1233.83 -229.25,-1233.83 -182.04,-1186.62 136.34,-1186.62 J1.8
PSYNC: U1.22 U4.2 | length 301.2
  Top Layer w4: U1.22 -278.38,-1165.39 -200.28,-1165.39 -149.18,-1114.29 v1(-149.18,-1077.94) v1@-149.18,-1073.94
  Bottom Layer w4: v1(-149.18,-1077.94) -149.18,-1064.4 -102.67,-1017.89 U4.2
"PSYNC C": J1.4 U4.13 | length 529.7
  Bottom Layer w4: U4.13 40.62,-1008.11 54.1,-1021.6 54.1,-1347.56 125.19,-1418.65 J1.4
SCL: Q1.2 R10.1 U1.20 | length 271.8
  Top Layer w5: U1.20 -393.49,-1093.4 -370.21,-1070.12 v1(-331.68,-1070.12)
  Bottom Layer w5: v1(-331.68,-1070.12) -274.93,-1070.12 -232.43,-1070.12 -211.16,-1048.85 R10.1
SCL_A: J1.1 Q1.3 R11.1 | length 979.5
  Bottom Layer w5: R11.1 -360.36,-1034.69 -358.4,-1032.72 -358.4,-1034.69 -358.4,-1093.4 -286.4,-1165.39 -48.35,-1165.39 40.86,-1254.61 40.86,-1362.61 149.58,-1471.33 181.52,-1471.33 228.84,-1518.65 J1.1
SDA: Q2.2 R14.1 U1.19 | length 217.2
  Top Layer w5: v1(-443.74,-1091.19) -443.49,-1091.43 U1.19
  Bottom Layer w5: Q2.2 -451.9,-1070.12 R14.1 -451.9,-1083.02 v1(-443.74,-1091.19)
SDA_B: J1.2 Q2.3 R15.1 | length 1104
  Bottom Layer w5: R15.1 -600,-1034.69 Q2.3 -598.03,-1034.69 -598.03,-1062.03 -477.58,-1182.48 -56.03,-1182.48 24.98,-1263.5 24.98,-1376.97 166.67,-1518.65 J1.2
SEQ: J1.7 U1.15 | length 1072.6
  Top Layer w5: U1.15 -643.49,-1203.72 -591.64,-1255.57 -221.51,-1255.57 -171.99,-1206.06 79.86,-1206.06 139.85,-1266.05 256.46,-1266.05 268.37,-1254.14 J1.7
VBUS: C12.1 C13.2 U1.5 | length 117.8
  Top Layer w8: U1.5 -819.54,-775.29 v1(-818.35,-776.48)
  Bottom Layer w10: v1(-818.35,-776.48) -800.29,-776.48 C13.2 -789.81,-786.96 C12.1
VRIN: C23.2 U1.42 | length 19.2
  Bottom Layer w20: C23.2 v1@-690.88,-549.17
  other v1: -691.39,-549.17
VSYNC: U1.24 U4.4 | length 153.9
  Top Layer w4: U1.24 -170.02,-1025.29 -147.82,-1003.08 v1(-147.82,-985.75)
  Bottom Layer w4: v1(-147.82,-985.75) -147.82,-978 -139.8,-969.97 -138.57,-968.74 U4.4
"VSYNC C": J1.5 U4.11 | length 543.8
  Bottom Layer w4: U4.11 18.46,-968.74 64.89,-968.74 79.18,-983.03 91.74,-995.59 91.74,-1217.85 142.53,-1268.65 218.37,-1268.65 J1.5
pads on no net: J1.3 U1.1 U1.2 U1.6 U1.7 U1.9 U1.12 U1.17 U1.18 U1.21 U1.31 U1.36 U1.37 U1.39 U1.40 U1.41 U6.5 U7.5

## Polygon pours and split planes (outlines as drawn)
4.2V on Bottom Layer "NONET_L-01_P-001" (solid, pour order 96): -530.81,-723.08 -528.29,-720.56 -528.29,-706.29 -528.29,-681.15 -543.93,-665.51 -567.7,-665.51 -582.73,-680.54 -611.61,-680.54 -611.61,-703.98 -651.98,-703.98 -651.98,-772.1 -570.48,-772.1 -570.48,-731.07 -562.49,-723.08
3.6V on Bottom Layer "NONET_L-01_P-001" (solid, pour order 127): -670.64,-769.18 -654.64,-753.18 -654.64,-720.79 -670.86,-704.57 -670.86,-681.59 -694.48,-681.59 -694.48,-708.64 -708.67,-722.82 -754.76,-722.82 -774.81,-702.77 -774.81,-618.28 -782.08,-611.01 -883.2,-611.01 -906.3,-587.91 -906.3,-483.87 -870.17,-447.73 -782.44,-447.73 -769.55,-460.62 -769.55,-569.89 -760.31,-579.13 -716.6,-579.13 -708.67,-571.19 -708.67,-429.17 -736.72,-401.11 -912.41,-401.11 -982.92,-471.62 -982.92,-1148.38 -948.8,-1182.49 -810.3,-1182.49 -810.3,-1105.92 -788.2,-1105.92 -775.28,-1093 -775.28,-1051.63 -782.28,-1044.63 -857.41,-1044.63 -877.33,-1024.72 -877.33,-764.28 -828.2,-715.15 -793.78,-715.15 -739.74,-769.18
3.3V on Bottom Layer "NONET_L-01_P-001" (solid, pour order 103): -93.08,-757.01 -79.62,-743.55 -79.62,-726.83 -69.55,-726.83 -66.05,-723.33 -66.05,-679.54 -56.6,-679.54 -56.6,-726.83 -56.6,-745.04 -49.51,-752.13 -36.04,-752.13 -28.12,-760.05 -28.12,-783.89 -36.95,-792.72 -84.65,-792.72 -93.08,-784.29
3.3V on Bottom Layer "NONET_L-01_P-001" (solid, pour order 92): -56.6,-1012.05 -56.03,-1012.62 -56.03,-1082.92 -50.11,-1088.84 -20.86,-1088.84 -16.84,-1092.86 -16.84,-1118.65 -28.03,-1129.84 -88.27,-1129.84 -88.27,-1060.19 -66.05,-1037.97 -66.05,-1012.05
3.3V on Bottom Layer "NONET_L-01_P-001" (solid, pour order 100): -410.4,-567.75 -406.33,-563.68 -402.85,-563.68 -380.93,-563.68 -373,-571.61 -373,-599.45 -354.72,-599.45 -317.22,-561.95 -317.22,-493.34 -350.71,-459.84 -487.65,-459.84 -525.94,-498.13 -525.94,-603.69 -495.87,-633.76 -495.87,-715.69 -498.75,-718.56 -498.75,-722.64 -495.87,-725.52 -460.96,-725.52 -451.9,-734.57 -432.43,-734.57 -424.91,-742.09 -424.91,-789.07 -419.29,-794.69 -366.11,-794.69 -366.11,-750.6 -383.22,-733.49 -400.71,-733.49 -437.04,-697.16 -460.83,-697.16 -475.8,-682.19 -475.8,-550.34 -469.26,-543.8 -443.6,-543.8 -428.6,-569.42 -428.6,-599.45 -410.4,-599.45
4.2V on Bottom Layer "NONET_L-01_P-001" (solid, pour order 109): -644.2,-592.28 -644.2,-477.27 -627.84,-460.92 -588.76,-460.92 -569.18,-480.49 -569.18,-613.34 -579.34,-623.5 -579.34,-644.19 -611.61,-644.19 -611.61,-624.87
3.3V on Bottom Layer "3.3V_L04_P110" (solid, pour order 110): 123.47,-46.04 116.47,-53.05 116.47,-137.72 124.92,-146.17 413.75,-146.17 413.75,-60.04 399.75,-46.04
3.3V on Bottom Layer "3.3V_L04_P112" (solid, pour order 112): 99.75,-961.04 114.75,-946.04 399.75,-946.04 413.75,-960.04 413.75,-1046.17 99.75,-1046.17
1.8V on Bottom Layer "NONET_L-01_P-001" (solid, pour order 114): -333.88,-696.26 -348.02,-682.12 -376,-682.12 -376,-658.5 -351.2,-658.5 -351.2,-638.66 -347.3,-634.76 -312.5,-634.76 -308.03,-639.22 -308.03,-670.97 -300.64,-678.36 -277.49,-678.36 -269,-669.87 -269,-525.04 -241.19,-497.23 -188.35,-497.23 -162.59,-522.99 -162.58,-671.45 -216.35,-725.22 -332.9,-725.22
GSK on Bottom Layer "NONET_L-01_P-001" (solid, pour order 116): -831.81,-909.31 -747.57,-909.31 -739.71,-917.17 -739.71,-939.32 -745.16,-944.78 -832.23,-944.78 -841.46,-935.55 -841.46,-918.97
GFID on Bottom Layer "NONET_L-01_P-001" (solid, pour order 122): -825.11,-1037.16 -833.93,-1028.35 -833.93,-1015.9 -822.65,-1004.62 -745.28,-1004.62 -737.29,-1012.6 -737.29,-1029.56 -744.89,-1037.16
GND on Bottom Layer "GND_L04_P129" (solid, remove dead copper, pour order 129): 60.46,-28.84 ccw(c60.46,-68.24) 32.6,-40.38 ccw(c60.17,-67.96) 21.18,-67.96 21.18,-227.49 cw(c-36.55,-227.49) 4.37,-268.21 -1.59,-274.16 cw(c-33.01,-242.74) -33.01,-287.17 -994.02,-287.17 ccw(c-994.02,-377.29) -1057.74,-313.57 ccw(c-1000.27,-371.05) -1081.55,-371.05 -1081.55,-1284.34 ccw(c-981.55,-1284.34) -1055.75,-1351.38 ccw(c-1000.17,-1295.8) -1000.18,-1374.4 -927.25,-1374.4 ccw(c-926.27,-1373.42) -926.28,-1374.8 -38.88,-1374.8 cw(c-38.88,-1432.98) 2.27,-1391.85 6.48,-1396.05 cw(c-28,-1430.54) 20.76,-1430.54 20.76,-1564.61 ccw(c70.2,-1564.61) 33.24,-1597.44 ccw(c60.03,-1570.65) 60.02,-1608.53 458.15,-1608.53 458.15,-28.84
GND on Drill Guide "GND_L02_P082" (solid, remove dead copper, pour order 82): 56.49,-28.84 ccw(c56.49,-58.66) 35.41,-37.57 32.6,-40.38 ccw(c60.17,-67.96) 21.18,-67.96 21.18,-227.49 cw(c-36.56,-227.48) 4.37,-268.21 -1.59,-274.16 cw(c-33.01,-242.73) -33.01,-287.17 -994.02,-287.17 ccw(c-994.02,-377.3) -1057.74,-313.57 ccw(c-1000.27,-371.05) -1081.55,-371.05 -1081.55,-1284.34 ccw(c-981.55,-1284.34) -1052.26,-1355.05 -1051.45,-1355.86 ccw(c-1006.7,-1311.11) -1006.7,-1374.4 -927.25,-1374.4 ccw(c-926.28,-1373.43) -926.28,-1374.8 -38.88,-1374.8 cw(c-38.88,-1432.99) 2.27,-1391.85 6.48,-1396.05 cw(c-28.01,-1430.54) 20.76,-1430.54 20.76,-1564.61 ccw(c70.2,-1564.61) 35.24,-1599.57 ccw(c56.89,-1577.92) 56.89,-1608.53 458.15,-1608.53 458.15,-37.21 458.17,-37.19 458.17,-28.84
GND on Top Layer "GND_L01_P118" (solid, remove dead copper, pour order 118): 65.92,-29.04 ccw(c65.91,-68.43) 38.06,-40.58 ccw(c65.62,-68.15) 26.63,-68.15 26.63,-227.69 cw(c-31.08,-227.68) 9.82,-268.4 3.87,-274.35 cw(c-27.55,-242.94) -27.55,-287.37 -988.56,-287.37 ccw(c-988.56,-377.48) -1052.29,-313.77 ccw(c-994.82,-371.24) -1076.09,-371.24 -1076.09,-1284.53 ccw(c-976.1,-1284.53) -1050.3,-1351.57 ccw(c-994.72,-1295.99) -994.72,-1374.59 -921.79,-1374.59 ccw(c-920.82,-1373.62) -920.82,-1375 -33.42,-1375 cw(c-33.42,-1433.17) 7.73,-1392.04 11.94,-1396.25 cw(c-22.53,-1430.73) 26.22,-1430.74 26.22,-1564.8 ccw(c75.66,-1564.8) 38.69,-1597.63 ccw(c65.48,-1570.84) 65.48,-1608.73 458.15,-1608.73 458.15,-29.04
3.6V on Top Layer "MM" (solid, pour order 106): -820.93,-638.99 -791.59,-638.99 -774.81,-655.77 -774.81,-707.55 -933.38,-707.55 -933.38,-1033.84 -922.58,-1044.63 -782.28,-1044.63 -775.28,-1051.63 -775.28,-1093 -788.2,-1105.92 -810.3,-1105.92 -810.3,-1218.89 -950.52,-1218.89 -1015.98,-1153.44 -1015.98,-489.83 -927.26,-401.11 -727.6,-401.11 -713.29,-415.42 -713.29,-576.55 -713.92,-577.18 -757.84,-577.18 -769.55,-565.47 -769.55,-456.03 -782.63,-442.95 -865.38,-442.95 -924.03,-501.6 -924.03,-631.93 -907.86,-648.09 -830.03,-648.09
VRIN on Top Layer "NONET_L-01_P-001" (solid, pour order 99): -681.68,-539.53 -669.64,-539.53 -662.14,-547.03 -662.14,-568.73 -670.34,-576.94 -697.91,-576.94 -705.34,-569.5 -705.3,-539.66 -705.3,-460.92 -681.68,-460.92
1.8V on Top Layer "NONET_L-01_P-001" (solid, pour order 90): -257.86,-587.1 -179.12,-587.1 -179.12,-528.44 -197.68,-509.88 -241.76,-509.88 -257.86,-525.98
GND on GND "GND_L02_P133" (solid, remove dead copper, pour order 133): 60.46,-28.65 ccw(c60.46,-68.04) 32.6,-40.19 ccw(c60.17,-67.76) 21.18,-67.76 21.18,-227.3 cw(c-36.55,-227.29) 4.37,-268.01 -1.59,-273.96 cw(c-33.01,-242.55) -33.01,-286.98 -994.02,-286.98 ccw(c-994.02,-377.1) -1057.74,-313.38 ccw(c-1000.27,-370.85) -1081.55,-370.85 -1081.55,-1284.14 ccw(c-981.55,-1284.14) -1055.75,-1351.18 ccw(c-1000.17,-1295.6) -1000.18,-1374.2 -927.25,-1374.2 ccw(c-926.27,-1373.23) -926.28,-1374.61 -38.88,-1374.61 cw(c-38.88,-1432.79) 2.27,-1391.65 6.48,-1395.86 cw(c-28,-1430.34) 20.76,-1430.35 20.76,-1564.41 ccw(c70.2,-1564.41) 33.24,-1597.24 ccw(c60.03,-1570.45) 60.02,-1608.34 458.15,-1608.34 458.15,-28.65
4.2V on PWR "NONET_L-01_P-001" (solid, pour order 87): -696.99,-646.7 -631.68,-712.01 -631.68,-1182.43 -595.91,-1217.93 -530.13,-1217.43 -530.13,-337.97 -550.46,-317.64 -676.15,-317.64 -696.99,-338.48
3.3V on PWR "NONET_L-01_P-001" (solid, pour order 86): 56.19,-1583.81 56.19,-1288.01 -50.51,-1181.31 -405.24,-1181.25 -522.3,-1064.2 -522.3,-337.31 -503.01,-318.01 -214.45,-318.01 -195.04,-337.43 -195.04,-384.3 -128.76,-450.58 -36.74,-450.58 10.83,-403.01 10.83,-297.4 56.19,-252.03 56.19,-73.34 81.69,-47.84 433.43,-47.84 433.43,-1583.81
1.8V on PWR "NONET_L-01_P-001" (solid, pour order 70): -54.18,-801.35 -132.74,-801.35 -256.27,-677.82 -314.28,-677.82 -318.62,-682.16 -318.62,-713.32 -299.13,-732.81 -240.31,-732.81 -138.49,-834.62 -55.55,-834.62 -36.92,-853.26 -36.92,-1053.23 -24.07,-1066.08 -5.1,-1066.08 4.87,-1056.11 4.87,-700.81 -5.77,-690.17 -36.92,-690.17 -36.92,-784.09
3.6V on PWR "NONET_L-01_P-001" (solid, pour order 131): -706.19,-645.15 -642.13,-709.21 -642.13,-1179.62 -718.09,-1255.57 -900.8,-1255.57 -959.99,-1196.38 -1008.98,-1196.38 -1048.79,-1156.57 -1048.79,-529.47 -837.29,-317.98 -726.74,-317.98 -706.19,-338.53

## Other copper
Top Layer:
  pour cut-out: -455.3,-539.66 -457.99,-542.34 -481.68,-542.34 -481.68,-461.14 -473.46,-452.92 -455.3,-452.92
  pour cut-out: -555.3,-578.95 -555.3,-539.66 -565.86,-550.21 -565.86,-577.18 -757.84,-577.18 -757.84,-582.59 -739.85,-600.58 -648.43,-600.58 -630.6,-618.42 -573.14,-618.42 -555.3,-600.58
  pour cut-out: -872.92,-541.46 -865.21,-549.17 -833.43,-549.17 -824.3,-558.3 -881.37,-558.3 -881.37,-541.46 -881.37,-468.86 -872.92,-460.41
  pour cut-out: -97.9,-592.1 -119.28,-613.48 -257.86,-613.48 -262.86,-608.48 -262.86,-592.1
  pour cut-out: -107.01,-637.1 -257.86,-637.1 -262.86,-642.1 -262.86,-658.48 -128.39,-658.48
  pour cut-out: -790.33,-775.89 -790.33,-1039.22 -806.48,-1023.07 -804.35,-1020.94 -804.35,-770.68 -811.56,-763.48 -820.93,-763.48 -907.86,-763.48 -927.96,-743.37 -927.96,-712.96 -908.38,-712.96 -907.86,-713.48 -907.86,-737.1 -829.12,-737.1
  pour cut-out: -174.12,-708.48 -156.38,-708.48 -158.41,-710.51 -172.09,-710.51
  pour cut-out: -79.99,-745.45 -80.21,-745.23 -80.21,-642.44 -76.81,-639.04 -74.43,-641.42 -74.43,-745.45
  pour cut-out: -142.04,-1086.14 -142.04,-933.2 -142.82,-932.42 -128.56,-932.42 -128.56,-1083.99 -131.66,-1087.1
Bottom Layer:
  pour cut-out: -733.43,-657.62 -726.81,-651 -699.29,-651 -699.29,-654.01 -705.31,-660.03 -731.14,-660.03 -735.84,-664.72 -735.84,-707.24 -737.07,-708.47 -761.56,-708.47 -764.91,-705.12 -765.33,-704.68 -743.13,-704.68 -737.07,-698.63 -737.07,-661.26
  pour cut-out: 300.34,-1550.62 300.34,-1314.44 293.95,-1320.83 293.95,-1545.62
  pour cut-out: 298.78,-587.87 298.78,-315.63 292.57,-321.84 292.57,-581.66
  pour cut-out: -216.35,-730.63 -171.29,-730.63 -164.4,-723.74 -208.05,-723.74
  pour cut-out: -147.11,-750.49 -104.17,-707.56 -98.2,-707.81 -80.31,-689.92 -82.54,-687.45 -159.54,-750.49
  pour cut-out: -11.43,-699.62 43.26,-699.62 62.23,-680.65 24.5,-680.65 22.41,-682.74 -13.82,-682.74 -18.48,-687.4 -18.48,-690.33
  pour cut-out: -18.52,-751.18 -23.97,-751.18 -22.71,-760.05 -21.83,-759.17
  pour cut-out: -273.83,-949.98 -233.41,-990.4 -196.12,-990.4 -196.12,-1042.71 -196.98,-1043.57 -196.98,-1157.63 -206.12,-1157.63 -203.77,-1155.28 -203.77,-1010.99 -201.32,-1008.53 -201.32,-989
  pour cut-out: -567.7,-660.09 -563.77,-656.17 -563.77,-615.58 -573.93,-625.74 -573.93,-659.27 -571.53,-661.68
  pour cut-out: -810.06,-828.75 -826.27,-812.53 -826.27,-788.35 -817.69,-788.35 -815.56,-790.48
  pour cut-out: -456.73,-691.75 -408.22,-691.75 -403.59,-687.12 -401.89,-688.82 -401.89,-695.1 -431.45,-695.1 -433.22,-693.34
  region net 3.3V: -495.87,-710.52 -495.87,-724.8 -495.15,-725.52 -484.94,-725.52
  region net 1.8V: -36.92,-679.54 -16.84,-699.62 -16.84,-741.85 -21.5,-746.51 -43.48,-746.51 -46.37,-743.63 -46.37,-679.54
  region net 1.8V: -46.34,-1074.1 -46.34,-1012.07 -46.37,-1012.05 -36.92,-1012.05 -26.68,-1022.29 -11,-1022.29 -7,-1026.29 -7,-1039.65 -22.21,-1054.87 -22.21,-1077.09 -24.15,-1079.02 -43.78,-1079.02 -46.33,-1076.47
  pour cut-out: -662.8,-696.35 -619.49,-696.35 -619.49,-696.86 -619.98,-697.35 -661.8,-697.35

## Silkscreen, mask and mechanical layers (free items; w line width, h text height)
Top Overlay:
  text "3V3" at 71.08,-130.06 h20
  text "GND" at 71.08,-223.85 h20
  text "MC" at 6.19,-329.66 h20
  text "/B5" at 71.08,-329.66 h20
  text "B6" at 6.19,-430.06 h20
  text "/B4" at 71.08,-430.06 h20
  text "B3" at 6.19,-530.06 h20
  text "/B2" at 71.08,-530.06 h20
  text "B1" at 12.85,-630.06 h20
  text "/B0" at 71.08,-630.06 h20
  text "3V3" at 71.08,-1024.22 h20
  text "GND" at 71.08,-1121.32 h20
  text "NRST" at 51.09,-1187.8 h20
  text "/SEQ" at 51.09,-1235.4 h20
  text "HSYNC" at 31.1,-1295.79 h20
  text "/VSYNC" at 11.1,-1343.97 h20
  text "PSYNC" at 31.1,-1417.68 h20
  text "SDA" at 71.08,-1503.3 h20
  text "/SCL" at 51.09,-1544.01 h20
Mechanical 13:
  lines w4: -1095.31,-1288.04 -1095.31,-362.53 cw(c-1006.25,-362.53) -1006.25,-273.46 -90.74,-273.46 ccw(c-89.25,-215.88) -31.67,-217.37 -31.67,-10 cw(c-10.83,-10.83) -10,10 ; -1094.69,-1288.12 ccw(c-1016.25,-1298.04) -1016.25,-1377.11 -80.74,-1377.11 ; -90.74,-1377.11 cw(c-86.97,-1432.41) -31.67,-1428.65 -31.67,-1471.58 -31.67,-1641.59 ccw(c-11.34,-1640.24) -10,-1660.57 503.15,-1660.57 503.15,-825.29 503.15,10 -10,10 ; -10,10 -10,10